# EAGLE board SparkFun_MicroMod_DA16200_Function-Panel (EAGLE 9.6.2), part 1 of 2
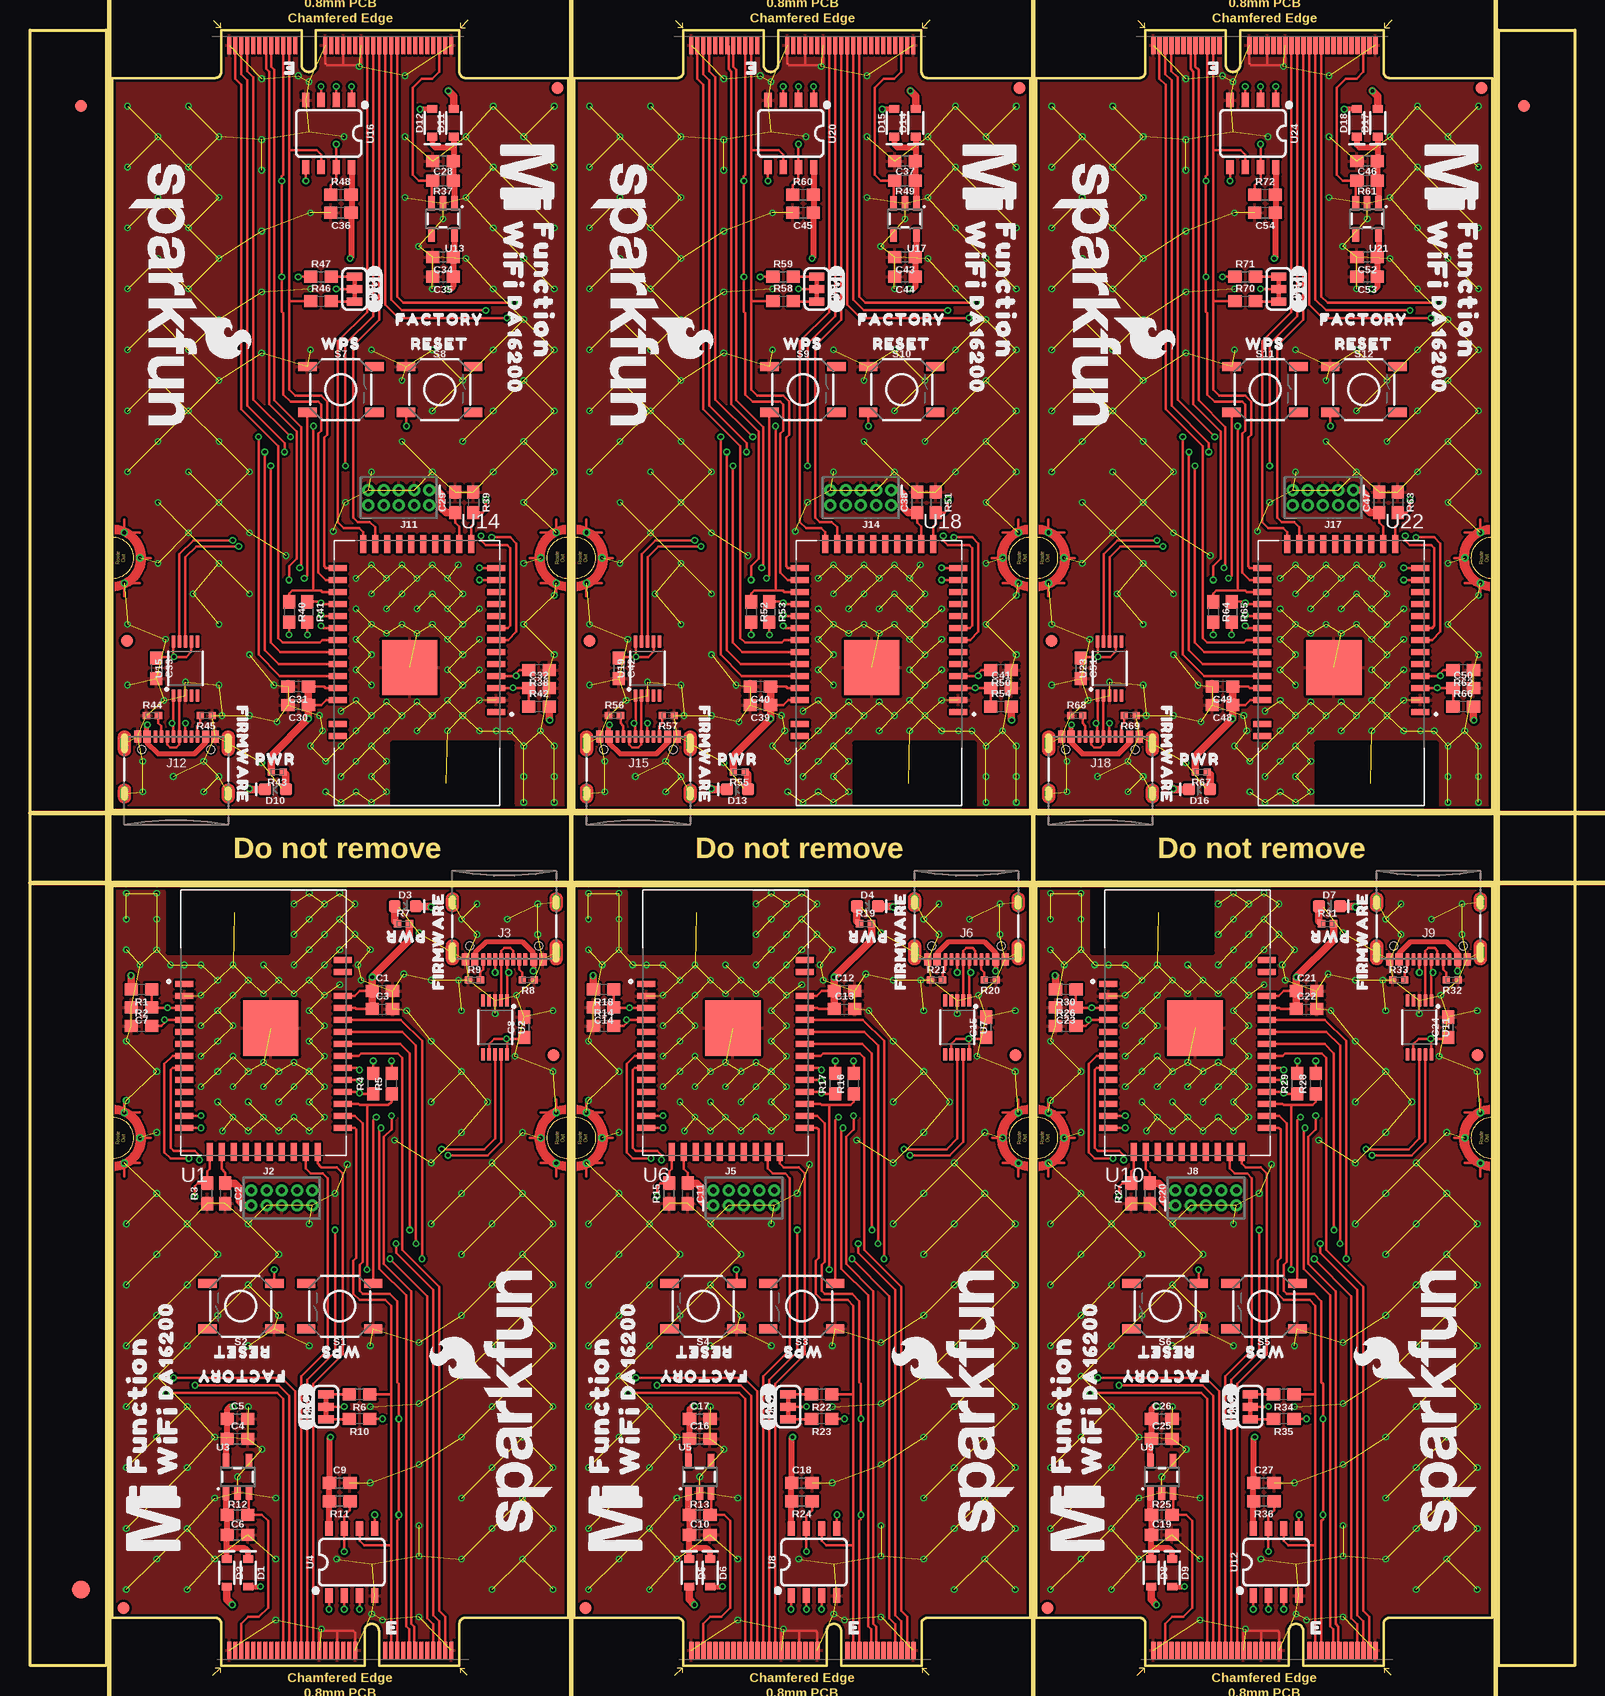
[diagram p0: board, top side]
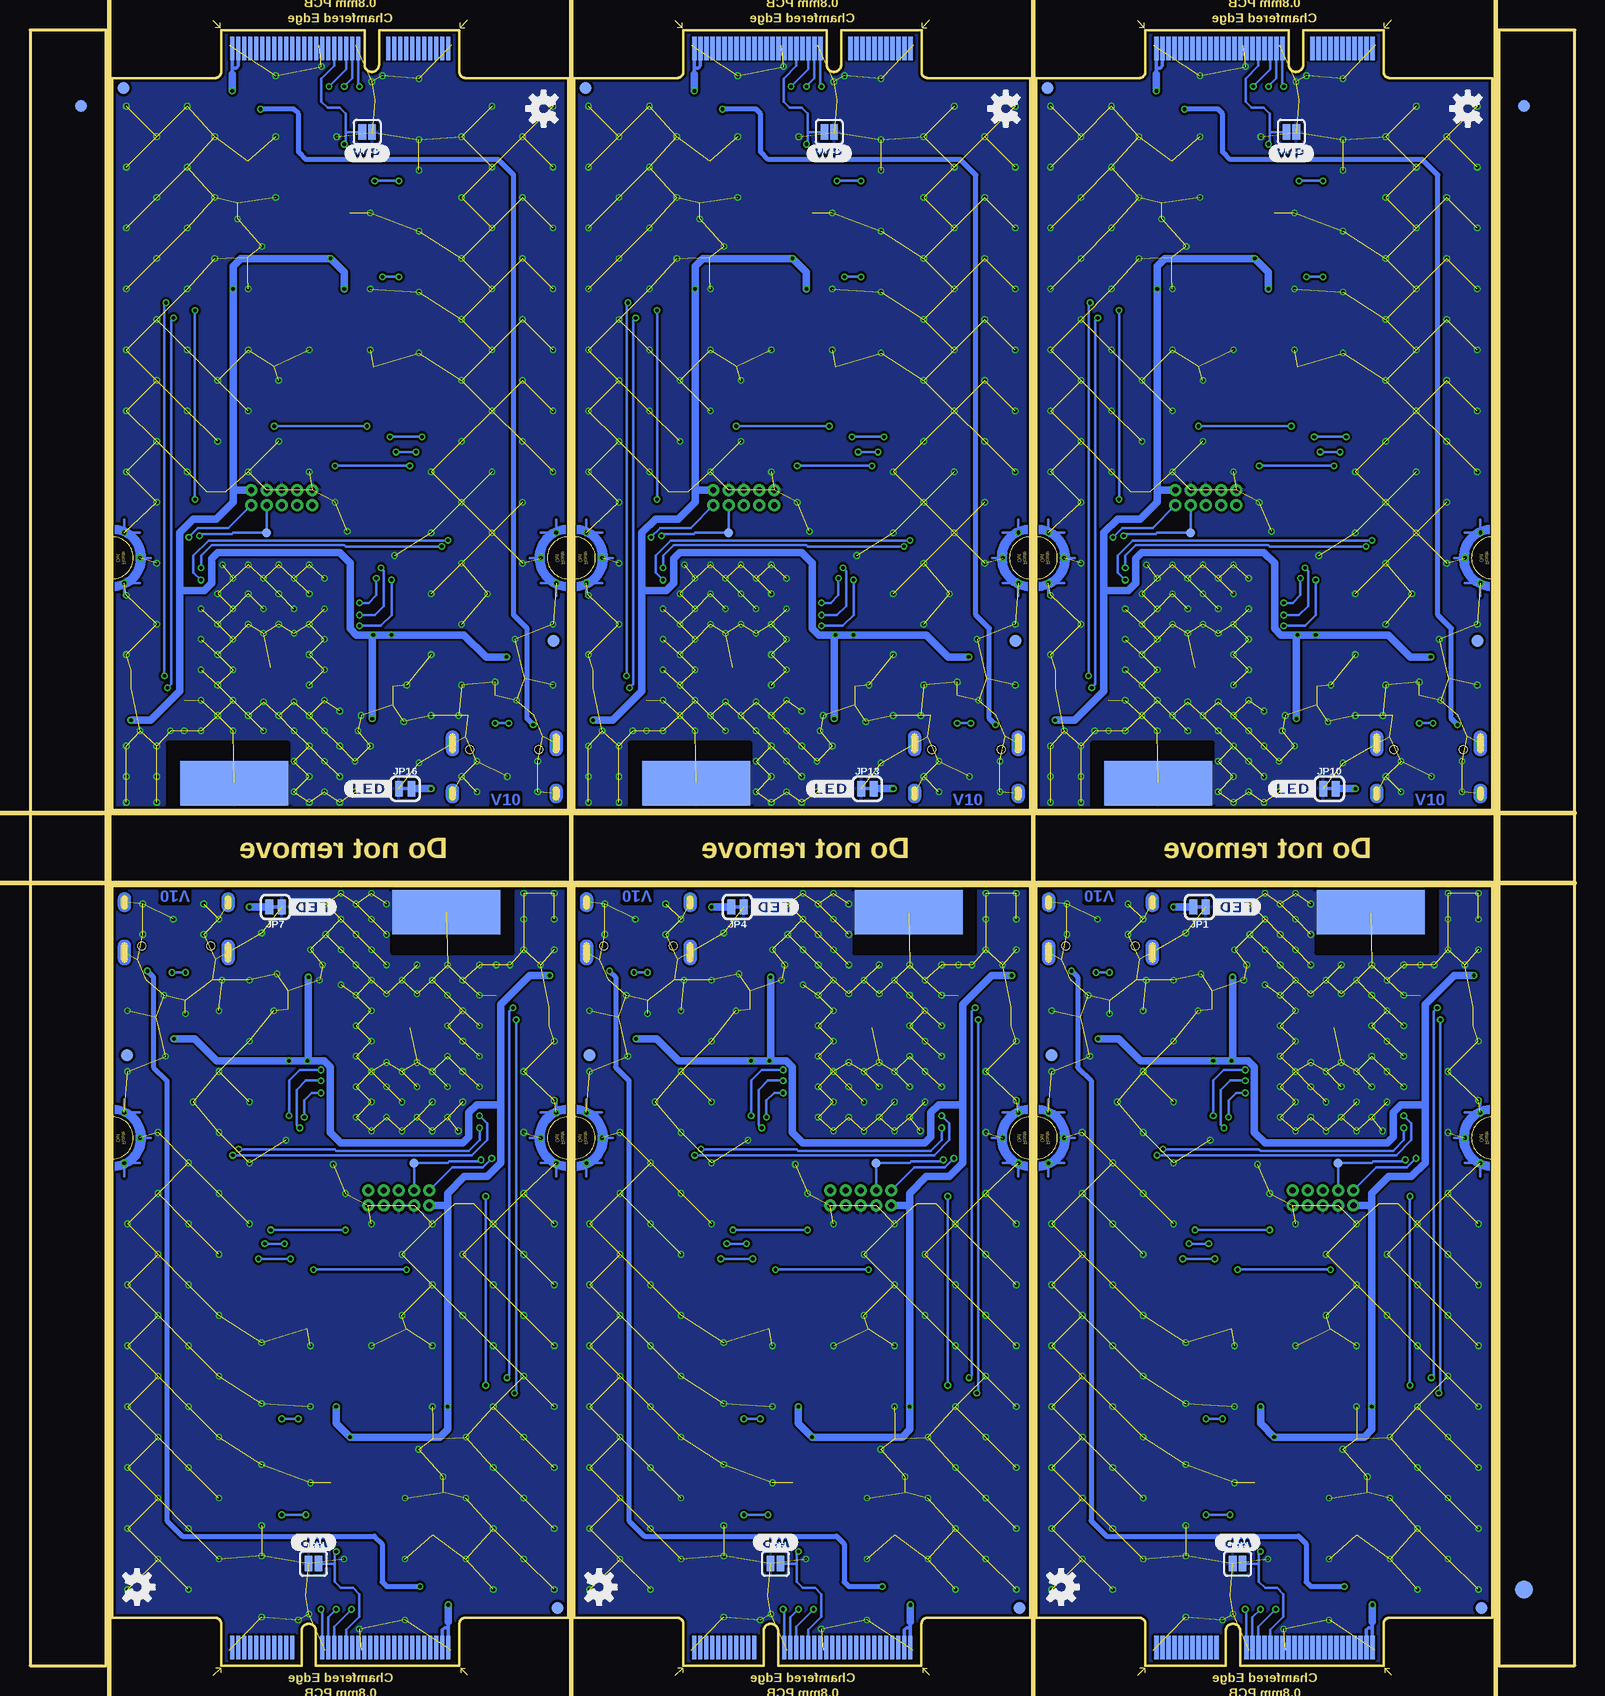
[diagram p1: board, bottom side, seen from below]

Size 128.73 x 136.35 mm. Coordinates in mm from the lower left corner, seen from the top.
Outline: 44.86,4 44.86,65 6.86,65 6.86,4 15.46,4 arc-84 15.93,3.5 15.93,0 27.88,0 27.88,2.9 arc-180 29.08,2.9 29.08,0 35.78,0 35.78,3.5 arc-85 36.26,4 44.86,4
Outline: 83.37,4 83.37,65 45.37,65 45.37,4 53.97,4 arc-84 54.44,3.5 54.44,0 66.39,0 66.39,2.9 arc-180 67.59,2.9 67.59,0 74.29,0 74.29,3.5 arc-85 74.77,4 83.37,4
Outline: 121.87,4 121.87,65 83.87,65 83.87,4 92.47,4 arc-84 92.95,3.5 92.95,0 104.9,0 104.9,2.9 arc-180 106.1,2.9 106.1,0 112.8,0 112.8,3.5 arc-85 113.27,4 121.87,4
Outline: 6.86,132.35 6.86,71.35 44.86,71.35 44.86,132.35 36.26,132.35 arc-84 35.78,132.85 35.78,136.35 23.83,136.35 23.83,133.45 arc-180 22.63,133.45 22.63,136.35 15.93,136.35 15.93,132.85 arc-85 15.46,132.35 6.86,132.35
Outline: 45.36,132.35 45.36,71.35 83.36,71.35 83.36,132.35 74.76,132.35 arc-84 74.29,132.85 74.29,136.35 62.34,136.35 62.34,133.45 arc-180 61.14,133.45 61.14,136.35 54.44,136.35 54.44,132.85 arc-85 53.96,132.35 45.36,132.35
Outline: 83.87,132.35 83.87,71.35 121.87,71.35 121.87,132.35 113.27,132.35 arc-84 112.8,132.85 112.8,136.35 100.85,136.35 100.85,133.45 arc-180 99.65,133.45 99.65,136.35 92.95,136.35 92.95,132.85 arc-85 92.47,132.35 83.87,132.35
Outline: 122.38,136.35 128.73,136.35 128.73,0 122.38,0 122.38,136.35
Outline: 0,136.35 6.35,136.35 6.35,0 0,0 0,136.35
Copper layers (1*16): Top 0.035mm / dielectric 1.5mm / Bottom 0.035mm
Design rules "SparkFun_MicroMod_DA16200_Function": minimum track width 5mil, minimum drill 0.3mm, track to track 5mil, track to pad 5mil, pad to pad 5mil, via to via 5mil, smd to smd 5mil, copper to edge 7mil, drill to drill 7mil, minimum pad ring 5mil, minimum via ring 5mil, stop-mask expansion 2.5mil, vias tented up to drill 25mil, thermal gap 10mil
Milling: 6 lines

## Footprints (pad centres in the part's own frame; a part is rotated, then mirrored left to right if it is on the bottom)
0603 = smd 1.1 x 1: 1 -0.85,0; 2 0.85,0
SOD-323 = smd 0.63 x 0.83: A 1.15,0; C -1.15,0
LED-0603 = smd 1 x 1: A -0.877,0; C 0.877,0
FIDUCIAL-1X2 = smd 1 x 1: 1 0,0
FIDUCIAL-1.5X3 = smd 1.5 x 1.5: 1 0,0
M.2-CARD-E-22_FUNCTION_STANDARD = smd 0.35 x 1.45: 1 9.25,1.275; 3 8.75,1.275; 5 8.25,1.275; 7 7.75,1.275; 9 7.25,1.275; 11 6.75,1.275; 13 6.25,1.275; 15 5.75,1.275; 17 5.25,1.275; 19 4.75,1.275; 21 4.25,1.275; 23 3.75,1.275; 33 1.25,1.275; 35 0.75,1.275; 37 0.25,1.275; 39 -0.25,1.275; 41 -0.75,1.275; 43 -1.25,1.275; 45 -1.75,1.275; 47 -2.25,1.275; 49 -2.75,1.275; 51 -3.25,1.275; 53 -3.75,1.275; 55 -4.25,1.275; 57 -4.75,1.275; 59 -5.25,1.275; 61 -5.75,1.275; 63 -6.25,1.275; 65 -6.75,1.275; 67 -7.25,1.275; 69 -7.75,1.275; 71 -8.25,1.275; 73 -8.75,1.275; 75 -9.25,1.275 | smd 0.35 x 1.95 bottom: 2 9,1.525; 4 8.5,1.525; 6 8,1.525; 8 7.5,1.525; 10 7,1.525; 12 6.5,1.525; 14 6,1.525; 16 5.5,1.525; 18 5,1.525; 20 4.5,1.525; 22 4,1.525; 32 1.5,1.525; 34 1,1.525; 36 0.5,1.525; 38 0,1.525; 40 -0.5,1.525; 42 -1,1.525; 44 -1.5,1.525; 46 -2,1.525; 48 -2.5,1.525; 50 -3,1.525; 52 -3.5,1.525; 54 -4,1.525; 56 -4.5,1.525; 58 -5,1.525; 60 -5.5,1.525; 62 -6,1.525; 64 -6.5,1.525; 66 -7,1.525; 68 -7.5,1.525; 70 -8,1.525; 72 -8.5,1.525; 74 -9,1.525 | drill 0.305 pad 0.61: GND1 -18,41.9; GND2 -16.7,44; GND3 -18,46.1; GND4 18,41.9; GND5 16.7,44; GND6 18,46.1
2X5-PTH-1.27MM-NO_SILK = drill 0.508 pad 1: 1 -2.54,-0.635; 2 -2.54,0.635; 3 -1.27,-0.635; 4 -1.27,0.635; 5 0,-0.635; 6 0,0.635; 7 1.27,-0.635; 8 1.27,0.635; 9 2.54,-0.635; 10 2.54,0.635
USB-C-16P-2LAYER-PADS = smd 0.3 x 1: A5 -1.25,-0.34; A6 -0.25,-0.34; A7 0.25,-0.34; A8 1.25,-0.34; B5 1.75,-0.34; B6 0.75,-0.34; B7 -0.75,-0.34; B8 -1.75,-0.34 | smd 0.6 x 1: GND -3.225,-0.34; GND2 3.225,-0.34; VBUS1 -2.45,-0.34; VBUS2 2.45,-0.34 | drill 0.4 pad 0.6 long: SHLD1 -4.318,-0.915; SHLD2 4.318,-0.915; SHLD3 -4.318,-5.095; SHLD4 4.318,-5.095 | hole 0.65: -2.89,-1.445; 2.89,-1.445
SMT-JUMPER_2_NC_TRACE_SILK = smd 0.66 x 1.27: 1 -0.521,0; 2 0.521,0
SMT-JUMPER_3_2-NC_TRACE_SILK = smd 0.66 x 1.27: 1 -1.041,0; 2 0,0; 3 1.041,0
SMT-JUMPER_2_NO_SILK = smd 0.635 x 1.27: 1 -0.406,0; 2 0.406,0
0402-TIGHT = smd 0.6 x 0.6: 1 -0.5,0; 2 0.5,0
TACTILE_SWITCH_SMD_5.2MM = smd 1.524 x 0.762: 1 -2.794,1.905; 2 2.794,1.905; 3 -2.794,-1.905; 4 2.794,-1.905
PAD.03X.03 = smd 0.762 x 0.762: 1 0,0
XCVR_DA16200MOD-AAC4WA32 = smd 1.5 x 0.5: 1 -6.6,3.25; 2 -6.6,2.25; 3 -6.6,1.25; 4 -6.6,0.25; 5 -6.6,-0.75; 6 -6.6,-1.75; 7 -6.6,-2.75; 8 -6.6,-3.75; 9 -6.6,-4.75; 10 -6.6,-5.75; 11 -6.6,-6.75; 12 -6.6,-7.75; 13 -6.6,-8.75; 24 6.6,-8.75; 25 6.6,-7.75; 26 6.6,-6.75; 27 6.6,-5.75; 28 6.6,-4.75; 29 6.6,-3.75; 30 6.6,-2.75; 31 6.6,-1.75; 32 6.6,-0.75; 33 6.6,0.25; 34 6.6,1.25; 35 6.6,2.25; 36 6.6,4.25; 37 6.6,5.25 | smd 0.5 x 1.5: 14 -4.5,-10.75; 15 -3.5,-10.75; 16 -2.5,-10.75; 17 -1.5,-10.75; 18 -0.5,-10.75; 19 0.5,-10.75; 20 1.5,-10.75; 21 2.5,-10.75; 22 3.5,-10.75; 23 4.5,-10.75 | smd 9 x 3.7 bottom: ANT_GND -2.45,9.2 | smd 4.6 x 4.6: GND 0.61,-0.45
MSOP10 = smd 1 x 0.3: 1 -2.25,1; 2 -2.25,0.5; 3 -2.25,0; 4 -2.25,-0.5; 5 -2.25,-1; 6 2.25,-1; 7 2.25,-0.5; 8 2.25,0; 9 2.25,0.5; 10 2.25,1
SOT23-5 = smd 0.55 x 1.2: 1 -0.95,-1.3; 2 0,-1.3; 3 0.95,-1.3; 4 0.95,1.3; 5 -0.95,1.3
SO08 = smd 0.6 x 1.2: 1 -1.905,-2.8; 2 -0.635,-2.8; 3 0.635,-2.8; 4 1.905,-2.8; 5 1.905,2.8; 6 0.635,2.8; 7 -0.635,2.8; 8 -1.905,2.8

## Placement (x,y rotation side)
C1  10uF  [0603]  29.36,56.26 0 top
C2  1uF  [0603]  16.28,39.37 270 top
C3  1uF  [0603]  29.36,54.74 0 top
C4  1.0uF  [0603]  17.3,18.92 0 top
C5  0.1uF  [0603]  17.3,20.57 0 top
C6  1.0uF  [0603]  17.3,10.92 0 top
C7  DNP  [0603]  9.3,54.86 180 top
C8  0.1uF  [0603]  41.18,53.21 90 top
C9  0.1uF  [0603]  25.81,15.24 0 top
C10  1.0uF  [0603]  55.81,10.92 0 top
C11  1uF  [0603]  54.79,39.37 270 top
C12  10uF  [0603]  67.87,56.26 0 top
C13  1uF  [0603]  67.87,54.74 0 top
C14  DNP  [0603]  47.81,54.86 180 top
C15  0.1uF  [0603]  79.68,53.21 90 top
C16  1.0uF  [0603]  55.81,18.92 0 top
C17  0.1uF  [0603]  55.81,20.57 0 top
C18  0.1uF  [0603]  64.32,15.24 0 top
C19  1.0uF  [0603]  94.32,10.92 0 top
C20  1uF  [0603]  93.3,39.37 270 top
C21  10uF  [0603]  106.38,56.26 0 top
C22  1uF  [0603]  106.38,54.74 0 top
C23  DNP  [0603]  86.31,54.86 180 top
C24  0.1uF  [0603]  118.19,53.21 90 top
C25  1.0uF  [0603]  94.32,18.92 0 top
C26  0.1uF  [0603]  94.32,20.57 0 top
C27  0.1uF  [0603]  102.82,15.24 0 top
C28  1.0uF  [0603]  34.42,125.43 180 top
C29  1uF  [0603]  35.43,96.98 90 top
C30  10uF  [0603]  22.35,80.09 180 top
C31  1uF  [0603]  22.35,81.61 180 top
C32  DNP  [0603]  42.42,81.49 0 top
C33  0.1uF  [0603]  10.54,83.14 270 top
C34  1.0uF  [0603]  34.42,117.43 180 top
C35  0.1uF  [0603]  34.42,115.78 180 top
C36  0.1uF  [0603]  25.91,121.11 180 top
C37  1.0uF  [0603]  72.92,125.43 180 top
C38  1uF  [0603]  73.94,96.98 90 top
C39  10uF  [0603]  60.86,80.09 180 top
C40  1uF  [0603]  60.86,81.61 180 top
C41  DNP  [0603]  80.92,81.49 0 top
C42  0.1uF  [0603]  49.05,83.14 270 top
C43  1.0uF  [0603]  72.92,117.43 180 top
C44  0.1uF  [0603]  72.92,115.78 180 top
C45  0.1uF  [0603]  64.41,121.11 180 top
C46  1.0uF  [0603]  111.43,125.43 180 top
C47  1uF  [0603]  112.45,96.98 90 top
C48  10uF  [0603]  99.37,80.09 180 top
C49  1uF  [0603]  99.37,81.61 180 top
C50  DNP  [0603]  119.43,81.49 0 top
C51  0.1uF  [0603]  87.56,83.14 270 top
C52  1.0uF  [0603]  111.43,117.43 180 top
C53  0.1uF  [0603]  111.43,115.78 180 top
C54  0.1uF  [0603]  102.92,121.11 180 top
D1  [SOD-323]  18.19,7.75 270 top
D2  [SOD-323]  16.41,7.75 270 top
D3  RED  [LED-0603]  31.27,63.3 0 top
D4  RED  [LED-0603]  69.78,63.3 0 top
D5  [SOD-323]  54.92,7.75 270 top
D6  [SOD-323]  56.7,7.75 270 top
D7  RED  [LED-0603]  108.29,63.3 0 top
D8  [SOD-323]  93.43,7.75 270 top
D9  [SOD-323]  95.2,7.75 270 top
D10  RED  [LED-0603]  20.45,73.05 180 top
D11  [SOD-323]  35.31,128.6 90 top
D12  [SOD-323]  33.53,128.6 90 top
D13  RED  [LED-0603]  58.95,73.05 180 top
D14  [SOD-323]  73.81,128.6 90 top
D15  [SOD-323]  72.03,128.6 90 top
D16  RED  [LED-0603]  97.46,73.05 180 top
D17  [SOD-323]  112.32,128.6 90 top
D18  [SOD-323]  110.54,128.6 90 top
E$1  [FIDUCIAL-1X2]  4.23,130 0 top
E$2  [FIDUCIAL-1X2]  4.23,130 0 bottom
E$3  [FIDUCIAL-1X2]  124.5,130 0 top
E$4  [FIDUCIAL-1X2]  124.5,130 0 bottom
E$5  [FIDUCIAL-1.5X3]  4.23,6.35 0 top
E$6  [FIDUCIAL-1.5X3]  4.23,6.35 0 bottom
FD1  FIDUCIAL1X2  [FIDUCIAL-1X2]  7.77,4.83 90 top
FD2  FIDUCIAL1X2  [FIDUCIAL-1X2]  7.77,4.83 270 bottom
FD3  FIDUCIAL1X2  [FIDUCIAL-1X2]  43.61,50.9 90 top
FD4  FIDUCIAL1X2  [FIDUCIAL-1X2]  43.61,50.9 270 bottom
FD5  FIDUCIAL1X2  [FIDUCIAL-1X2]  46.28,4.83 90 top
FD6  FIDUCIAL1X2  [FIDUCIAL-1X2]  46.28,4.83 270 bottom
FD7  FIDUCIAL1X2  [FIDUCIAL-1X2]  82.12,50.9 90 top
FD8  FIDUCIAL1X2  [FIDUCIAL-1X2]  82.12,50.9 270 bottom
FD9  FIDUCIAL1X2  [FIDUCIAL-1X2]  84.79,4.83 90 top
FD10  FIDUCIAL1X2  [FIDUCIAL-1X2]  84.79,4.83 270 bottom
FD11  FIDUCIAL1X2  [FIDUCIAL-1X2]  120.63,50.9 90 top
FD12  FIDUCIAL1X2  [FIDUCIAL-1X2]  120.63,50.9 270 bottom
FD13  FIDUCIAL1X2  [FIDUCIAL-1X2]  43.94,131.52 270 top
FD14  FIDUCIAL1X2  [FIDUCIAL-1X2]  43.94,131.52 90 bottom
FD15  FIDUCIAL1X2  [FIDUCIAL-1X2]  8.1,85.45 270 top
FD16  FIDUCIAL1X2  [FIDUCIAL-1X2]  8.1,85.45 90 bottom
FD17  FIDUCIAL1X2  [FIDUCIAL-1X2]  82.45,131.52 270 top
FD18  FIDUCIAL1X2  [FIDUCIAL-1X2]  82.45,131.52 90 bottom
FD19  FIDUCIAL1X2  [FIDUCIAL-1X2]  46.61,85.45 270 top
FD20  FIDUCIAL1X2  [FIDUCIAL-1X2]  46.61,85.45 90 bottom
FD21  FIDUCIAL1X2  [FIDUCIAL-1X2]  120.96,131.52 270 top
FD22  FIDUCIAL1X2  [FIDUCIAL-1X2]  120.96,131.52 90 bottom
FD23  FIDUCIAL1X2  [FIDUCIAL-1X2]  85.12,85.45 270 top
FD24  FIDUCIAL1X2  [FIDUCIAL-1X2]  85.12,85.45 90 bottom
J1  MICROMOD_STANDARD  [M.2-CARD-E-22_FUNCTION_STANDARD]  25.86,0 0 top
J2  CORTEX_JTAG_DEBUG  [2X5-PTH-1.27MM-NO_SILK]  20.98,38.99 0 top
J3  [USB-C-16P-2LAYER-PADS]  39.52,58.55 180 top
J4  MICROMOD_STANDARD  [M.2-CARD-E-22_FUNCTION_STANDARD]  64.37,0 0 top
J5  CORTEX_JTAG_DEBUG  [2X5-PTH-1.27MM-NO_SILK]  59.49,38.99 0 top
J6  [USB-C-16P-2LAYER-PADS]  78.03,58.55 180 top
J7  MICROMOD_STANDARD  [M.2-CARD-E-22_FUNCTION_STANDARD]  102.87,0 0 top
J8  CORTEX_JTAG_DEBUG  [2X5-PTH-1.27MM-NO_SILK]  98,38.99 0 top
J9  [USB-C-16P-2LAYER-PADS]  116.54,58.55 180 top
J10  MICROMOD_STANDARD  [M.2-CARD-E-22_FUNCTION_STANDARD]  25.86,136.35 180 top
J11  CORTEX_JTAG_DEBUG  [2X5-PTH-1.27MM-NO_SILK]  30.73,97.36 180 top
J12  [USB-C-16P-2LAYER-PADS]  12.19,77.8 0 top
J13  MICROMOD_STANDARD  [M.2-CARD-E-22_FUNCTION_STANDARD]  64.36,136.35 180 top
J14  CORTEX_JTAG_DEBUG  [2X5-PTH-1.27MM-NO_SILK]  69.24,97.36 180 top
J15  [USB-C-16P-2LAYER-PADS]  50.7,77.8 0 top
J16  MICROMOD_STANDARD  [M.2-CARD-E-22_FUNCTION_STANDARD]  102.87,136.35 180 top
J17  CORTEX_JTAG_DEBUG  [2X5-PTH-1.27MM-NO_SILK]  107.75,97.36 180 top
J18  [USB-C-16P-2LAYER-PADS]  89.21,77.8 0 top
JP1  JUMPER-SMT_2_NC_TRACE_SILK  [SMT-JUMPER_2_NC_TRACE_SILK]  31.27,63.25 180 bottom
JP2  JUMPER-SMT_3_2-NC_TRACE_SILK  [SMT-JUMPER_3_2-NC_TRACE_SILK]  24.67,21.59 90 top
JP3  [SMT-JUMPER_2_NO_SILK]  28.09,8.51 0 bottom
JP4  JUMPER-SMT_2_NC_TRACE_SILK  [SMT-JUMPER_2_NC_TRACE_SILK]  69.78,63.25 180 bottom
JP5  JUMPER-SMT_3_2-NC_TRACE_SILK  [SMT-JUMPER_3_2-NC_TRACE_SILK]  63.17,21.59 90 top
JP6  [SMT-JUMPER_2_NO_SILK]  66.6,8.51 0 bottom
JP7  JUMPER-SMT_2_NC_TRACE_SILK  [SMT-JUMPER_2_NC_TRACE_SILK]  108.29,63.25 180 bottom
JP8  JUMPER-SMT_3_2-NC_TRACE_SILK  [SMT-JUMPER_3_2-NC_TRACE_SILK]  101.68,21.59 90 top
JP9  [SMT-JUMPER_2_NO_SILK]  105.11,8.51 0 bottom
JP10  JUMPER-SMT_2_NC_TRACE_SILK  [SMT-JUMPER_2_NC_TRACE_SILK]  20.45,73.1 0 bottom
JP11  JUMPER-SMT_3_2-NC_TRACE_SILK  [SMT-JUMPER_3_2-NC_TRACE_SILK]  27.05,114.76 270 top
JP12  [SMT-JUMPER_2_NO_SILK]  23.62,127.84 180 bottom
JP13  JUMPER-SMT_2_NC_TRACE_SILK  [SMT-JUMPER_2_NC_TRACE_SILK]  58.95,73.1 0 bottom
JP14  JUMPER-SMT_3_2-NC_TRACE_SILK  [SMT-JUMPER_3_2-NC_TRACE_SILK]  65.56,114.76 270 top
JP15  [SMT-JUMPER_2_NO_SILK]  62.13,127.84 180 bottom
JP16  JUMPER-SMT_2_NC_TRACE_SILK  [SMT-JUMPER_2_NC_TRACE_SILK]  97.46,73.1 0 bottom
JP17  JUMPER-SMT_3_2-NC_TRACE_SILK  [SMT-JUMPER_3_2-NC_TRACE_SILK]  104.07,114.76 270 top
JP18  [SMT-JUMPER_2_NO_SILK]  100.64,127.84 180 bottom
LOGO1  SFE_LOGO_NAME_FLAME.2_INCH  [SFE_LOGO_NAME_FLAME_.2]  40.64,22.12 90 top
LOGO2  OSHW-LOGOS  [OSHW-LOGO-S]  42.8,6.55 270 bottom
LOGO3  SFE_LOGO_NAME_FLAME.2_INCH  [SFE_LOGO_NAME_FLAME_.2]  79.15,22.12 90 top
LOGO4  OSHW-LOGOS  [OSHW-LOGO-S]  81.31,6.55 270 bottom
LOGO5  SFE_LOGO_NAME_FLAME.2_INCH  [SFE_LOGO_NAME_FLAME_.2]  117.66,22.12 90 top
LOGO6  OSHW-LOGOS  [OSHW-LOGO-S]  119.82,6.55 270 bottom
LOGO7  SFE_LOGO_NAME_FLAME.2_INCH  [SFE_LOGO_NAME_FLAME_.2]  11.07,114.23 270 top
LOGO8  OSHW-LOGOS  [OSHW-LOGO-S]  8.92,129.8 90 bottom
LOGO9  SFE_LOGO_NAME_FLAME.2_INCH  [SFE_LOGO_NAME_FLAME_.2]  49.58,114.23 270 top
LOGO10  OSHW-LOGOS  [OSHW-LOGO-S]  47.42,129.8 90 bottom
LOGO11  SFE_LOGO_NAME_FLAME.2_INCH  [SFE_LOGO_NAME_FLAME_.2]  88.09,114.23 270 top
LOGO12  OSHW-LOGOS  [OSHW-LOGO-S]  85.93,129.8 90 bottom
R1  DNP  [0603]  9.3,56.39 180 top
R2  4.7k  [0603]  9.3,53.34 0 top
R3  4.7k  [0603]  14.76,39.37 90 top
R4  4.7k  [0603]  28.6,48.51 90 top
R5  4.7k  [0603]  30.13,48.51 90 top
R6  4.7k  [0603]  27.46,22.61 180 top
R7  1k  [0402-TIGHT]  31.12,61.85 0 top
R8  5.1k  [0402-TIGHT]  41.51,57.15 180 top
R9  5.1k  [0402-TIGHT]  37.04,57.15 0 top
R10  4.7k  [0603]  27.46,20.57 180 top
R11  10k  [0603]  25.81,13.72 180 top
R12  100k  [0603]  17.3,12.57 0 top
R13  100k  [0603]  55.81,12.57 0 top
R14  4.7k  [0603]  47.81,53.34 0 top
R15  4.7k  [0603]  53.27,39.37 90 top
R16  4.7k  [0603]  68.64,48.51 90 top
R17  4.7k  [0603]  67.11,48.51 90 top
R18  DNP  [0603]  47.81,56.39 180 top
R19  1k  [0402-TIGHT]  69.63,61.85 0 top
R20  5.1k  [0402-TIGHT]  80.02,57.15 180 top
R21  5.1k  [0402-TIGHT]  75.54,57.15 0 top
R22  4.7k  [0603]  65.97,22.61 180 top
R23  4.7k  [0603]  65.97,20.57 180 top
R24  10k  [0603]  64.32,13.72 180 top
R25  100k  [0603]  94.32,12.57 0 top
R26  4.7k  [0603]  86.31,53.34 0 top
R27  4.7k  [0603]  91.78,39.37 90 top
R28  4.7k  [0603]  107.14,48.51 90 top
R29  4.7k  [0603]  105.62,48.51 90 top
R30  DNP  [0603]  86.31,56.39 180 top
R31  1k  [0402-TIGHT]  108.13,61.85 0 top
R32  5.1k  [0402-TIGHT]  118.53,57.15 180 top
R33  5.1k  [0402-TIGHT]  114.05,57.15 0 top
R34  4.7k  [0603]  104.48,22.61 180 top
R35  4.7k  [0603]  104.48,20.57 180 top
R36  10k  [0603]  102.82,13.72 180 top
R37  100k  [0603]  34.42,123.78 180 top
R38  4.7k  [0603]  42.42,83.01 180 top
R39  4.7k  [0603]  36.96,96.98 270 top
R40  4.7k  [0603]  21.59,87.84 270 top
R41  4.7k  [0603]  23.11,87.84 270 top
R42  DNP  [0603]  42.42,79.96 0 top
R43  1k  [0402-TIGHT]  20.6,74.5 180 top
R44  5.1k  [0402-TIGHT]  10.2,79.2 0 top
R45  5.1k  [0402-TIGHT]  14.68,79.2 180 top
R46  4.7k  [0603]  24.26,113.74 0 top
R47  4.7k  [0603]  24.26,115.78 0 top
R48  10k  [0603]  25.91,122.63 0 top
R49  100k  [0603]  72.92,123.78 180 top
R50  4.7k  [0603]  80.92,83.01 180 top
R51  4.7k  [0603]  75.46,96.98 270 top
R52  4.7k  [0603]  60.1,87.84 270 top
R53  4.7k  [0603]  61.62,87.84 270 top
R54  DNP  [0603]  80.92,79.96 0 top
R55  1k  [0402-TIGHT]  59.11,74.5 180 top
R56  5.1k  [0402-TIGHT]  48.71,79.2 0 top
R57  5.1k  [0402-TIGHT]  53.19,79.2 180 top
R58  4.7k  [0603]  62.76,113.74 0 top
R59  4.7k  [0603]  62.76,115.78 0 top
R60  10k  [0603]  64.41,122.63 0 top
R61  100k  [0603]  111.43,123.78 180 top
R62  4.7k  [0603]  119.43,83.01 180 top
R63  4.7k  [0603]  113.97,96.98 270 top
R64  4.7k  [0603]  98.61,87.84 270 top
R65  4.7k  [0603]  100.13,87.84 270 top
R66  DNP  [0603]  119.43,79.96 0 top
R67  1k  [0402-TIGHT]  97.61,74.5 180 top
R68  5.1k  [0402-TIGHT]  87.22,79.2 0 top
R69  5.1k  [0402-TIGHT]  91.7,79.2 180 top
R70  4.7k  [0603]  101.27,113.74 0 top
R71  4.7k  [0603]  101.27,115.78 0 top
R72  10k  [0603]  102.92,122.63 0 top
S1  WPS  [TACTILE_SWITCH_SMD_5.2MM]  25.81,29.97 180 top
S2  FACTORY_RESET  [TACTILE_SWITCH_SMD_5.2MM]  17.58,29.97 180 top
S3  WPS  [TACTILE_SWITCH_SMD_5.2MM]  64.32,29.97 180 top
S4  FACTORY_RESET  [TACTILE_SWITCH_SMD_5.2MM]  56.09,29.97 180 top
S5  WPS  [TACTILE_SWITCH_SMD_5.2MM]  102.82,29.97 180 top
S6  FACTORY_RESET  [TACTILE_SWITCH_SMD_5.2MM]  94.59,29.97 180 top
S7  WPS  [TACTILE_SWITCH_SMD_5.2MM]  25.91,106.38 0 top
S8  FACTORY_RESET  [TACTILE_SWITCH_SMD_5.2MM]  34.14,106.38 0 top
S9  WPS  [TACTILE_SWITCH_SMD_5.2MM]  64.41,106.38 0 top
S10  FACTORY_RESET  [TACTILE_SWITCH_SMD_5.2MM]  72.64,106.38 0 top
S11  WPS  [TACTILE_SWITCH_SMD_5.2MM]  102.92,106.38 0 top
S12  FACTORY_RESET  [TACTILE_SWITCH_SMD_5.2MM]  111.15,106.38 0 top
TP1  [PAD.03X.03]  19.71,41.91 270 bottom
TP2  [PAD.03X.03]  58.22,41.91 270 bottom
TP3  [PAD.03X.03]  96.73,41.91 270 bottom
TP4  [PAD.03X.03]  32,94.44 90 bottom
TP5  [PAD.03X.03]  70.51,94.44 90 bottom
TP6  [PAD.03X.03]  109.02,94.44 90 bottom
U1  DA16200MOD  [XCVR_DA16200MOD-AAC4WA32]  19.46,53.59 0 top
U2  CH340E_MSOP10  [MSOP10]  38.76,53.21 270 top
U3  3.3V  [SOT23-5]  17.3,15.75 0 top
U4  EEPROM  [SO08]  26.82,8.64 0 top
U5  3.3V  [SOT23-5]  55.81,15.75 0 top
U6  DA16200MOD  [XCVR_DA16200MOD-AAC4WA32]  57.97,53.59 0 top
U7  CH340E_MSOP10  [MSOP10]  77.27,53.21 270 top
U8  EEPROM  [SO08]  65.33,8.64 0 top
U9  3.3V  [SOT23-5]  94.32,15.75 0 top
U10  DA16200MOD  [XCVR_DA16200MOD-AAC4WA32]  96.47,53.59 0 top
U11  CH340E_MSOP10  [MSOP10]  115.78,53.21 270 top
U12  EEPROM  [SO08]  103.84,8.64 0 top
U13  3.3V  [SOT23-5]  34.42,120.6 180 top
U14  DA16200MOD  [XCVR_DA16200MOD-AAC4WA32]  32.26,82.76 180 top
U15  CH340E_MSOP10  [MSOP10]  12.95,83.14 90 top
U16  EEPROM  [SO08]  24.89,127.71 180 top
U17  3.3V  [SOT23-5]  72.92,120.6 180 top
U18  DA16200MOD  [XCVR_DA16200MOD-AAC4WA32]  70.76,82.76 180 top
U19  CH340E_MSOP10  [MSOP10]  51.46,83.14 90 top
U20  EEPROM  [SO08]  63.4,127.71 180 top
U21  3.3V  [SOT23-5]  111.43,120.6 180 top
U22  DA16200MOD  [XCVR_DA16200MOD-AAC4WA32]  109.27,82.76 180 top
U23  CH340E_MSOP10  [MSOP10]  89.97,83.14 90 top
U24  EEPROM  [SO08]  101.91,127.71 180 top
U$1  [FIRMWARE0]  34.01,60.38 90 top
U$2  [PWR0]  31.27,60.78 180 top
U$3  [#LED#0]  30.38,63.25 180 bottom
U$4  [FUNCTION0]  8.92,21.72 90 top
U$5  [DA162000]  11.33,26.24 90 top
U$6  [WIFI0]  11.46,18.8 90 top
U$7  [WPS0]  25.81,26.16 180 top
U$8  [FACTORY0]  17.58,24.13 180 top
U$9  [RESET0]  17.58,26.16 180 top
U$10  [#WP#0]  28.09,10.29 180 bottom
U$11  [#I2C#0]  23.01,21.59 90 top
U$12  [MICROMOD_MI_LOGO_1]  10.24,12.32 90 top
U$13  [FIRMWARE0]  72.52,60.38 90 top
U$14  [PWR0]  69.78,60.78 180 top
U$15  [#LED#0]  68.89,63.25 180 bottom
U$16  [FUNCTION0]  47.43,21.72 90 top
U$17  [DA162000]  49.84,26.24 90 top
U$18  [WPS0]  64.32,26.16 180 top
U$19  [FACTORY0]  56.09,24.13 180 top
U$20  [RESET0]  56.09,26.16 180 top
U$21  [#I2C#0]  61.52,21.59 90 top
U$22  [MICROMOD_MI_LOGO_1]  48.75,12.32 90 top
U$23  [WIFI0]  49.97,18.8 90 top
U$24  [#WP#0]  66.6,10.29 180 bottom
U$25  [FIRMWARE0]  111.03,60.38 90 top
U$26  [PWR0]  108.29,60.78 180 top
U$27  [#LED#0]  107.4,63.25 180 bottom
U$28  [FUNCTION0]  85.93,21.72 90 top
U$29  [DA162000]  88.35,26.24 90 top
U$30  [WPS0]  102.82,26.16 180 top
U$31  [FACTORY0]  94.59,24.13 180 top
U$32  [RESET0]  94.59,26.16 180 top
U$33  [#I2C#0]  100.03,21.59 90 top
U$34  [MICROMOD_MI_LOGO_1]  87.25,12.32 90 top
U$35  [WIFI0]  88.47,18.8 90 top
U$36  [#WP#0]  105.11,10.29 180 bottom
U$37  [FIRMWARE0]  17.7,75.97 270 top
U$38  [PWR0]  20.45,75.57 0 top
U$39  [#LED#0]  21.34,73.1 0 bottom
U$40  [FUNCTION0]  42.8,114.63 270 top
U$41  [DA162000]  40.39,110.11 270 top
U$42  [WPS0]  25.91,110.19 0 top
U$43  [FACTORY0]  34.14,112.22 0 top
U$44  [RESET0]  34.14,110.19 0 top
U$45  [#I2C#0]  28.7,114.76 270 top
U$46  [MICROMOD_MI_LOGO_1]  41.48,124.03 270 top
U$47  [WIFI0]  40.26,117.55 270 top
U$48  [#WP#0]  23.62,126.06 0 bottom
U$49  [FIRMWARE0]  56.21,75.97 270 top
U$50  [PWR0]  58.95,75.57 0 top
U$51  [#LED#0]  59.84,73.1 0 bottom
U$52  [FUNCTION0]  81.31,114.63 270 top
U$53  [DA162000]  78.89,110.11 270 top
U$54  [WPS0]  64.41,110.19 0 top
U$55  [FACTORY0]  72.64,112.22 0 top
U$56  [RESET0]  72.64,110.19 0 top
U$57  [#I2C#0]  67.21,114.76 270 top
U$58  [MICROMOD_MI_LOGO_1]  79.98,124.03 270 top
U$59  [WIFI0]  78.77,117.55 270 top
U$60  [#WP#0]  62.13,126.06 0 bottom
U$61  [FIRMWARE0]  94.72,75.97 270 top
U$62  [PWR0]  97.46,75.57 0 top
U$63  [#LED#0]  98.35,73.1 0 bottom
U$64  [FUNCTION0]  119.81,114.63 270 top
U$65  [DA162000]  117.4,110.11 270 top
U$66  [WPS0]  102.92,110.19 0 top
U$67  [FACTORY0]  111.15,112.22 0 top
U$68  [RESET0]  111.15,110.19 0 top
U$69  [#I2C#0]  105.72,114.76 270 top
U$70  [MICROMOD_MI_LOGO_1]  118.49,124.03 270 top
U$71  [WIFI0]  117.27,117.55 270 top
U$72  [#WP#0]  100.64,126.06 0 bottom

## Library data of the parts
C1 C12 C21 C30 C39 C48 = SparkFun-Capacitors; PROD_ID: CAP-11015
C2-C4 C6 C10 C11 C13 C16 C19 C20 C22 C25 C28 C29 C31 C34 C37 C38 C40 C43 C46 C47 C49 C52 = SparkFun-Capacitors; PROD_ID: CAP-00868
C5 C8 C9 C15 C17 C18 C24 C26 C27 C33 C35 C36 C42 C44 C45 C51 C53 C54 = SparkFun-Capacitors; PROD_ID: CAP-00810
C7 C14 C23 C32 C41 C50 = SparkFun-Capacitors
D1 D2 D5 D6 D8 D9 D11 D12 D14 D15 D17 D18 = SparkFun-DiscreteSemi; PROD_ID: DIO-14072
D3 D4 D7 D10 D13 D16 J1 J4 J7 J10 J13 J16 = SparkFun-MicroMod-Function
E$1-E$4 FD1-FD24 LOGO1-LOGO12 = SparkFun-Aesthetics
E$5 E$6 = SparkFun-Retired
J2 J5 J8 J11 J14 J17 TP1-TP6 = SparkFun-Connectors
J3 J6 J9 J12 J15 J18 = SparkFun-Connectors; PROD_ID: CONN-14122
JP1-JP18 = SparkFun-Jumpers
R1 R18 R30 R42 R54 R66 = SparkFun-Resistors
R2-R6 R10 R14-R17 R22 R23 R26-R29 R34 R35 R38-R41 R46 R47 R50-R53 R58 R59 R62-R65 R70 R71 = SparkFun-Resistors; PROD_ID: RES-07857
R7 R19 R31 R43 R55 R67 = SparkFun-Resistors; PROD_ID: RES-14342
R8 R9 R20 R21 R32 R33 R44 R45 R56 R57 R68 R69 = SparkFun-Resistors; PROD_ID: RES-14340
R11 R24 R36 R48 R60 R72 = SparkFun-Resistors; PROD_ID: RES-00824
R12 R13 R25 R37 R49 R61 = SparkFun-Resistors; PROD_ID: RES-07828
S1-S12 = SparkFun-Switches; PROD_ID: SWCH-14139
U1 U6 U10 U14 U18 U22 = DA16200MOD; PROD_ID: IC-16179
U2 U7 U11 U15 U19 U23 = SparkFun-IC-Comms; PROD_ID: IC-14135
U3 U5 U9 U13 U17 U21 = SparkFun-IC-Power; PROD_ID: VREG-12457
U4 U8 U12 U16 U20 U24 = SparkFun-IC-Memory; PROD_ID: IC-14645
U$1-U$11 U$13-U$21 U$23-U$33 U$35-U$45 U$47-U$57 U$59-U$69 U$71 U$72 = output
U$12 U$22 U$34 U$46 U$58 U$70 = SparkFun-MicroMod

## Nets
3.3V: C1.1 C2.1 C3.1 C4.1 C5.1 C8.1 C9.1 J2.1 JP2.2 R1.2 R4.2 R5.2 R7.2 R11.2 U1.15 U1.34 U1.35 U2.7 U2.10 U3.5 U4.8
3.3V1: C11.1 C12.1 C13.1 C15.1 C16.1 C17.1 C18.1 J5.1 JP5.2 R16.2 R17.2 R18.2 R19.2 R24.2 U5.5 U6.15 U6.34 U6.35 U7.7 U7.10 U8.8
3.3V2: C20.1 C21.1 C22.1 C24.1 C25.1 C26.1 C27.1 J8.1 JP8.2 R28.2 R29.2 R30.2 R31.2 R36.2 U9.5 U10.15 U10.34 U10.35 U11.7 U11.10 U12.8
3.3V3: C29.1 C30.1 C31.1 C33.1 C34.1 C35.1 C36.1 J11.1 JP11.2 R40.2 R41.2 R42.2 R43.2 R48.2 U13.5 U14.15 U14.34 U14.35 U15.7 U15.10 U16.8
3.3V4: C38.1 C39.1 C40.1 C42.1 C43.1 C44.1 C45.1 J14.1 JP14.2 R52.2 R53.2 R54.2 R55.2 R60.2 U17.5 U18.15 U18.34 U18.35 U19.7 U19.10 U20.8
3.3V5: C47.1 C48.1 C49.1 C51.1 C52.1 C53.1 C54.1 J17.1 JP17.2 R64.2 R65.2 R66.2 R67.2 R72.2 U21.5 U22.15 U22.34 U22.35 U23.7 U23.10 U24.8
!CS!: J1.49 U1.31
!CS!1: J4.49 U6.31
!CS!2: J7.49 U10.31
!CS!3: J10.49 U14.31
!CS!4: J13.49 U18.31
!CS!5: J16.49 U22.31
CIPO: J1.7 U1.33
CIPO1: J4.7 U6.33
CIPO2: J7.7 U10.33
CIPO3: J10.7 U14.33
CIPO4: J13.7 U18.33
CIPO5: J16.7 U22.33
COPI: J1.5 U1.32
COPI1: J4.5 U6.32
COPI2: J7.5 U10.32
COPI3: J10.5 U14.32
COPI4: J13.5 U18.32
COPI5: J16.5 U22.32
EN: J1.71 R12.2 U3.3
EN1: J4.71 R13.2 U5.3
EN2: J7.71 R25.2 U9.3
EN3: J10.71 R37.2 U13.3
EN4: J13.71 R49.2 U17.3
EN5: J16.71 R61.2 U21.3
EWP: J1.40 JP3.2 R11.1 U4.7
EWP1: J4.40 JP6.2 R24.1 U8.7
EWP2: J7.40 JP9.2 R36.1 U12.7
EWP3: J10.40 JP12.2 R48.1 U16.7
EWP4: J13.40 JP15.2 R60.1 U20.7
EWP5: J16.40 JP18.2 R72.1 U24.7
FACTORY_RESET: R5.1 S2.3 U1.26
FACTORY_RESET1: R16.1 S4.3 U6.26
FACTORY_RESET2: R28.1 S6.3 U10.26
FACTORY_RESET3: R40.1 S8.3 U14.26
FACTORY_RESET4: R52.1 S10.3 U18.26
FACTORY_RESET5: R64.1 S12.3 U22.26
GND: C1.2 C2.2 C3.2 C4.2 C5.2 C6.2 C7.2 C8.2 C9.2 J1.1 J1.33 J1.39 J1.45 J1.75 J1.GND1 J1.GND2 J1.GND3 J1.GND4 J1.GND5 J1.GND6 J2.3 J2.5 J2.9 J3.GND J3.GND2 J3.SHLD1 J3.SHLD2 J3.SHLD3 J3.SHLD4 JP1.1 JP3.1 R2.1 R3.1 R8.1 R9.1 S1.1 S2.1 U1.2 U1.ANT_GND U1.GND U2.3 U3.2 U4.4
GND1: C10.2 C11.2 C12.2 C13.2 C14.2 C15.2 C16.2 C17.2 C18.2 J4.1 J4.33 J4.39 J4.45 J4.75 J4.GND1 J4.GND2 J4.GND3 J4.GND4 J4.GND5 J4.GND6 J5.3 J5.5 J5.9 J6.GND J6.GND2 J6.SHLD1 J6.SHLD2 J6.SHLD3 J6.SHLD4 JP4.1 JP6.1 R14.1 R15.1 R20.1 R21.1 S3.1 S4.1 U5.2 U6.2 U6.ANT_GND U6.GND U7.3 U8.4
GND2: C19.2 C20.2 C21.2 C22.2 C23.2 C24.2 C25.2 C26.2 C27.2 J7.1 J7.33 J7.39 J7.45 J7.75 J7.GND1 J7.GND2 J7.GND3 J7.GND4 J7.GND5 J7.GND6 J8.3 J8.5 J8.9 J9.GND J9.GND2 J9.SHLD1 J9.SHLD2 J9.SHLD3 J9.SHLD4 JP7.1 JP9.1 R26.1 R27.1 R32.1 R33.1 S5.1 S6.1 U9.2 U10.2 U10.ANT_GND U10.GND U11.3 U12.4
GND3: C28.2 C29.2 C30.2 C31.2 C32.2 C33.2 C34.2 C35.2 C36.2 J10.1 J10.33 J10.39 J10.45 J10.75 J10.GND1 J10.GND2 J10.GND3 J10.GND4 J10.GND5 J10.GND6 J11.3 J11.5 J11.9 J12.GND J12.GND2 J12.SHLD1 J12.SHLD2 J12.SHLD3 J12.SHLD4 JP10.1 JP12.1 R38.1 R39.1 R44.1 R45.1 S7.1 S8.1 U13.2 U14.2 U14.ANT_GND U14.GND U15.3 U16.4
GND4: C37.2 C38.2 C39.2 C40.2 C41.2 C42.2 C43.2 C44.2 C45.2 J13.1 J13.33 J13.39 J13.45 J13.75 J13.GND1 J13.GND2 J13.GND3 J13.GND4 J13.GND5 J13.GND6 J14.3 J14.5 J14.9 J15.GND J15.GND2 J15.SHLD1 J15.SHLD2 J15.SHLD3 J15.SHLD4 JP13.1 JP15.1 R50.1 R51.1 R56.1 R57.1 S9.1 S10.1 U17.2 U18.2 U18.ANT_GND U18.GND U19.3 U20.4
GND5: C46.2 C47.2 C48.2 C49.2 C50.2 C51.2 C52.2 C53.2 C54.2 J16.1 J16.33 J16.39 J16.45 J16.75 J16.GND1 J16.GND2 J16.GND3 J16.GND4 J16.GND5 J16.GND6 J17.3 J17.5 J17.9 J18.GND J18.GND2 J18.SHLD1 J18.SHLD2 J18.SHLD3 J18.SHLD4 JP16.1 JP18.1 R62.1 R63.1 R68.1 R69.1 S11.1 S12.1 U21.2 U22.2 U22.ANT_GND U22.GND U23.3 U24.4
GPIOA1: J4.47 U6.23
GPIOA2: J4.51 U6.22
GPIOA3: J7.47 U10.23
GPIOA4: J7.51 U10.22
GPIOA5: J10.47 U14.23
GPIOA6: J10.51 U14.22
GPIOA7: J13.47 U18.23
GPIOA8: J13.51 U18.22
GPIOA9: J16.47 U22.23
GPIOA10: J1.47 U1.23
GPIOA11: J1.51 U1.22
GPIOA12: J16.51 U22.22
I2C_SCL: J1.21 R6.1 U1.24 U4.6
I2C_SCL1: J4.21 R22.1 U6.24 U8.6
I2C_SCL2: J7.21 R34.1 U10.24 U12.6
I2C_SCL3: J10.21 R46.1 U14.24 U16.6
I2C_SCL4: J13.21 R58.1 U18.24 U20.6
I2C_SCL5: J16.21 R70.1 U22.24 U24.6
I2C_SDA: J1.19 R10.1 U1.25 U4.5
I2C_SDA1: J4.19 R23.1 U6.25 U8.5
I2C_SDA2: J7.19 R35.1 U10.25 U12.5
I2C_SDA3: J10.19 R47.1 U14.25 U16.5
I2C_SDA4: J13.19 R59.1 U18.25 U20.5
I2C_SDA5: J16.19 R71.1 U22.25 U24.5
N$1: J1.36 U4.1
N$2: J3.A5 R8.2
N$3: C6.1 D1.C D2.C R12.1 U3.1
N$4: D4.C JP4.2
N$5: J3.B5 R9.2
N$6: D3.C JP1.2
N$7: D3.A R7.1
N$8: J1.32 U4.3
N$9: J1.34 U4.2
N$10: J3.A6 J3.B6 U2.1
N$11: J3.A7 J3.B7 U2.2
N$12: D4.A R19.1
N$13: JP2.1 R10.2
N$14: JP2.3 R6.2
N$15: J6.A5 R20.2
N$16: J6.B5 R21.2
N$17: J6.A6 J6.B6 U7.1
N$18: J6.A7 J6.B7 U7.2
N$19: J4.32 U8.3
N$20: J4.34 U8.2
N$21: J4.36 U8.1
N$22: JP5.1 R23.2
N$23: JP5.3 R22.2
N$24: C10.1 D5.C D6.C R13.1 U5.1
N$25: D7.C JP7.2
N$26: D7.A R31.1
N$27: J9.A5 R32.2
N$28: J9.B5 R33.2
N$29: J9.A6 J9.B6 U11.1
N$30: J9.A7 J9.B7 U11.2
N$31: J7.32 U12.3
N$32: J7.34 U12.2
N$33: J7.36 U12.1
N$34: JP8.1 R35.2
N$35: JP8.3 R34.2
N$36: C19.1 D8.C D9.C R25.1 U9.1
N$37: D10.C JP10.2
N$38: D10.A R43.1
N$39: J12.A5 R44.2
N$40: J12.B5 R45.2
N$41: J12.A6 J12.B6 U15.1
N$42: J12.A7 J12.B7 U15.2
N$43: J10.32 U16.3
N$44: J10.34 U16.2
N$45: J10.36 U16.1
N$46: JP11.1 R47.2
N$47: JP11.3 R46.2
N$48: C28.1 D11.C D12.C R37.1 U13.1
N$49: D13.C JP13.2
N$50: D13.A R55.1
N$51: J15.A5 R56.2
N$52: J15.B5 R57.2
N$53: J15.A6 J15.B6 U19.1
N$54: J15.A7 J15.B7 U19.2
N$55: J13.32 U20.3
N$56: J13.34 U20.2
N$57: J13.36 U20.1
N$58: JP14.1 R59.2
N$59: JP14.3 R58.2
N$60: C37.1 D14.C D15.C R49.1 U17.1
N$61: D16.C JP16.2
N$62: D16.A R67.1
N$63: J18.A5 R68.2
N$64: J18.B5 R69.2
N$65: J18.A6 J18.B6 U23.1
N$66: J18.A7 J18.B7 U23.2
N$67: J16.32 U24.3
N$68: J16.34 U24.2
N$69: J16.36 U24.1
N$70: JP17.1 R71.2
N$71: JP17.3 R70.2
N$72: C46.1 D17.C D18.C R61.1 U21.1
RTC_PWR_KEY: C7.1 J1.53 R1.1 U1.3
RTC_PWR_KEY1: C14.1 J4.53 R18.1 U6.3
RTC_PWR_KEY2: C23.1 J7.53 R30.1 U10.3
RTC_PWR_KEY3: C32.1 J10.53 R42.1 U14.3
RTC_PWR_KEY4: C41.1 J13.53 R54.1 U18.3
RTC_PWR_KEY5: C50.1 J16.53 R66.1 U22.3
RTC_WAKE1: J1.57 R2.2 U1.4
RTC_WAKE2: J1.55 R3.2 U1.14
RTC_WAKE3: J4.57 R14.2 U6.4
RTC_WAKE4: J4.55 R15.2 U6.14
RTC_WAKE5: J7.57 R26.2 U10.4
RTC_WAKE6: J7.55 R27.2 U10.14
RTC_WAKE7: J10.57 R38.2 U14.4
RTC_WAKE8: J10.55 R39.2 U14.14
RTC_WAKE9: J13.57 R50.2 U18.4
RTC_WAKE10: J13.55 R51.2 U18.14
RTC_WAKE11: J16.57 R62.2 U22.4
RTC_WAKE12: J16.55 R63.2 U22.14
SCK: J1.3 U1.30
SCK1: J4.3 U6.30
SCK2: J7.3 U10.30
SCK3: J10.3 U14.30
SCK4: J13.3 U18.30
SCK5: J16.3 U22.30
TCLK: J2.4 TP1.1 U1.8
TCLK1: J5.4 TP2.1 U6.8
TCLK2: J8.4 TP3.1 U10.8
TCLK3: J11.4 TP4.1 U14.8
TCLK4: J14.4 TP5.1 U18.8
TCLK5: J17.4 TP6.1 U22.8
TMS: J2.2 U1.7
TMS1: J5.2 U6.7
TMS2: J8.2 U10.7
TMS3: J11.2 U14.7
TMS4: J14.2 U18.7
TMS5: J17.2 U22.7
U0RXI: U1.13 U2.8
U0RXI1: U6.13 U7.8
U0RXI2: U10.13 U11.8
U0RXI3: U14.13 U15.8
U0RXI4: U18.13 U19.8
U0RXI5: U22.13 U23.8
U0TXO: U1.12 U2.9
U0TXO1: U6.12 U7.9
U0TXO2: U10.12 U11.9
U0TXO3: U14.12 U15.9
U0TXO4: U18.12 U19.9
U0TXO5: U22.12 U23.9
U1RXI: J1.15 U1.28
U1RXI1: J4.15 U6.28
U1RXI2: J7.15 U10.28
U1RXI3: J10.15 U14.28
U1RXI4: J13.15 U18.28
U1RXI5: J16.15 U22.28
U1TXO: J1.13 U1.29
U1TXO1: J4.13 U6.29
U1TXO2: J7.13 U10.29
U1TXO3: J10.13 U14.29
U1TXO4: J13.13 U18.29
U1TXO5: J16.13 U22.29
V_USB: D1.A J3.VBUS1 J3.VBUS2
V_USB1: D6.A J6.VBUS1 J6.VBUS2
V_USB2: D9.A J9.VBUS1 J9.VBUS2
V_USB3: D12.A J12.VBUS1 J12.VBUS2
V_USB4: D15.A J15.VBUS1 J15.VBUS2
V_USB5: D18.A J18.VBUS1 J18.VBUS2
VCC: D2.A J1.72 J1.74
VCC1: D5.A J4.72 J4.74
VCC2: D8.A J7.72 J7.74
VCC3: D11.A J10.72 J10.74
VCC4: D14.A J13.72 J13.74
VCC5: D17.A J16.72 J16.74
WPS: R4.1 S1.3 U1.27
WPS1: R17.1 S3.3 U6.27
WPS2: R29.1 S5.3 U10.27
WPS3: R41.1 S7.3 U14.27
WPS4: R53.1 S9.3 U18.27
WPS5: R65.1 S11.3 U22.27

## Tracks (layer width: path | path; a pad name or v marks a point on that pad's centre or on a via)
3.3V  (via drill 0.3)
  Top 0.203: R5.2 v30.13,50.42 | R4.2 v28.6,50.42 | C3.1 27.21,54.74 27.1,54.84 U1.34 | C1.1 27.46,56.26 27.04,55.84 U1.35 | C2.1 16.28,41.08 15.96,41.4 U1.15 | C8.1 41.07,52.26 v39.72,52.26 | U2.10 39.76,52.21 v39.72,52.26 | U2.7 38.26,51.82 38.7,52.26 v39.72,52.26 | JP2.2 v26.19,21.59
  Top 0.508: U3.5 16.35,18.82 C4.1 C5.1 16.45,21.38 16.66,21.59 v16.92,21.59 | U4.8 24.92,13.68 R11.2 24.92,13.76 24.92,15.24 C9.1 24.96,18.96 v25.05,19.05
  Top 0.61: R7.2 31.62,60.51 v28.52,57.4 C1.1 C3.1 | R1.2 8.45,57.49 v8.41,57.53 | J2.1 17.81,38.35 17.43,38.73 17.43,39.84 17.05,40.22 C2.1
  Bottom 0.61: v39.72,52.26 38,52.26 36.16,50.42 v30.13,50.42 v28.6,50.42 | v28.6,50.42 28.52,50.42 v28.52,57.4 | v8.41,57.53 10.06,57.53 12.47,55.12 12.47,46.74 | 12.47,46.74 12.47,41.91 13.62,40.77 15.52,40.77 16.92,39.37 16.92,38.35 | J2.1 16.92,38.35 | 16.92,38.35 v16.92,21.59 16.92,19.68 17.55,19.05 v25.05,19.05 26.19,20.19 v26.19,21.59 | 12.47,46.74 14.51,46.74 15.14,46.1 15.14,44.07 15.65,43.56 25.81,43.56 26.7,44.45 26.7,49.91 27.21,50.42 v28.6,50.42
3.3V1  (via drill 0.3)
  Top 0.203: R16.2 v68.64,50.42 | R17.2 v67.11,50.42 | C13.1 65.72,54.74 65.61,54.84 U6.34 | C12.1 65.97,56.26 65.55,55.84 U6.35 | C11.1 54.79,41.08 54.47,41.4 U6.15 | C15.1 79.58,52.26 v78.23,52.26 | U7.10 78.27,52.21 v78.23,52.26 | U7.7 76.77,51.82 77.2,52.26 v78.23,52.26 | JP5.2 v64.7,21.59
  Top 0.508: U5.5 54.86,18.82 C16.1 C17.1 54.96,21.38 55.17,21.59 v55.43,21.59 | U8.8 63.43,13.68 R24.2 63.43,13.76 63.43,15.24 C18.1 63.47,18.96 v63.56,19.05
  Top 0.61: R19.2 70.13,60.51 v67.02,57.4 C12.1 C13.1 | R18.2 46.96,57.49 v46.92,57.53 | J5.1 56.32,38.35 55.94,38.73 55.94,39.84 55.55,40.22 C11.1
  Bottom 0.61: v78.23,52.26 76.51,52.26 74.67,50.42 v68.64,50.42 v67.11,50.42 | v67.11,50.42 67.02,50.42 v67.02,57.4 | v46.92,57.53 48.57,57.53 50.98,55.12 50.98,46.74 | 50.98,46.74 50.98,41.91 52.13,40.77 54.03,40.77 55.43,39.37 55.43,38.35 | J5.1 55.43,38.35 | 55.43,38.35 v55.43,21.59 55.43,19.68 56.06,19.05 v63.56,19.05 64.7,20.19 v64.7,21.59 | 50.98,46.74 53.01,46.74 53.65,46.1 53.65,44.07 54.16,43.56 64.32,43.56 65.21,44.45 65.21,49.91 65.72,50.42 v67.11,50.42
3.3V2  (via drill 0.3)
  Top 0.203: R28.2 v107.14,50.42 | R29.2 v105.62,50.42 | C22.1 104.22,54.74 104.11,54.84 U10.34 | C21.1 104.48,56.26 104.06,55.84 U10.35 | C20.1 93.3,41.08 92.97,41.4 U10.15 | C24.1 118.08,52.26 v116.73,52.26 | U11.10 116.78,52.21 v116.73,52.26 | U11.7 115.28,51.82 115.71,52.26 v116.73,52.26 | JP8.2 v103.2,21.59
  Top 0.508: U9.5 93.37,18.82 C25.1 C26.1 93.47,21.38 93.68,21.59 v93.93,21.59 | U12.8 101.94,13.68 R36.2 101.94,13.76 101.94,15.24 C27.1 101.97,18.96 v102.06,19.05
  Top 0.61: R31.2 108.63,60.51 v105.53,57.4 C21.1 C22.1 | R30.2 85.46,57.49 v85.42,57.53 | J8.1 94.82,38.35 94.44,38.73 94.44,39.84 94.06,40.22 C20.1
  Bottom 0.61: v116.73,52.26 115.02,52.26 113.18,50.42 v107.14,50.42 v105.62,50.42 | v105.62,50.42 105.53,50.42 v105.53,57.4 | v85.42,57.53 87.08,57.53 89.49,55.12 89.49,46.74 | 89.49,46.74 89.49,41.91 90.63,40.77 92.54,40.77 93.93,39.37 93.93,38.35 | J8.1 93.93,38.35 | 93.93,38.35 v93.93,21.59 93.93,19.68 94.57,19.05 v102.06,19.05 103.2,20.19 v103.2,21.59 | 89.49,46.74 91.52,46.74 92.16,46.1 92.16,44.07 92.66,43.56 102.82,43.56 103.71,44.45 103.71,49.91 104.22,50.42 v105.62,50.42
3.3V3  (via drill 0.3)
  Top 0.203: R40.2 v21.59,85.93 | R41.2 v23.11,85.93 | C31.1 24.51,81.61 24.62,81.51 U14.34 | C30.1 24.26,80.09 24.67,80.51 U14.35 | C29.1 35.43,95.27 35.76,94.95 U14.15 | C33.1 10.65,84.09 v12,84.09 | U15.10 11.95,84.14 v12,84.09 | U15.7 13.45,84.53 13.02,84.09 v12,84.09 | JP11.2 v25.53,114.76
  Top 0.508: U13.5 35.37,117.53 C34.1 C35.1 35.27,114.97 35.05,114.76 v34.8,114.76 | U16.8 26.8,122.67 R48.2 26.8,122.59 26.8,121.11 C36.1 26.76,117.39 v26.67,117.3
  Top 0.61: R43.2 20.1,75.84 v23.2,78.95 C30.1 C31.1 | R42.2 43.27,78.86 v43.31,78.82 | J11.1 33.91,98 34.29,97.61 34.29,96.51 34.67,96.13 C29.1
  Bottom 0.61: v12,84.09 13.72,84.09 15.55,85.93 v21.59,85.93 v23.11,85.93 | v23.11,85.93 23.2,85.93 v23.2,78.95 | v43.31,78.82 41.66,78.82 39.24,81.23 39.24,89.61 | 39.24,89.61 39.24,94.44 38.1,95.58 36.2,95.58 34.8,96.98 34.8,98 | J11.1 34.8,98 | 34.8,98 v34.8,114.76 34.8,116.67 34.16,117.3 v26.67,117.3 25.53,116.16 v25.53,114.76 | 39.24,89.61 37.21,89.61 36.58,90.25 36.58,92.28 36.07,92.79 25.91,92.79 25.02,91.9 25.02,86.44 24.51,85.93 v23.11,85.93
3.3V4  (via drill 0.3)
  Top 0.203: R52.2 v60.1,85.93 | R53.2 v61.62,85.93 | C40.1 63.02,81.61 63.12,81.51 U18.34 | C39.1 62.76,80.09 63.18,80.51 U18.35 | C38.1 73.94,95.27 74.26,94.95 U18.15 | C42.1 49.15,84.09 v50.5,84.09 | U19.10 50.46,84.14 v50.5,84.09 | U19.7 51.96,84.53 51.53,84.09 v50.5,84.09 | JP14.2 v64.03,114.76
  Top 0.508: U17.5 73.87,117.53 C43.1 C44.1 73.77,114.97 73.56,114.76 v73.3,114.76 | U20.8 65.3,122.67 R60.2 65.3,122.59 65.3,121.11 C45.1 65.26,117.39 v65.18,117.3
  Top 0.61: R55.2 58.61,75.84 v61.71,78.95 C39.1 C40.1 | R54.2 81.77,78.86 v81.81,78.82 | J14.1 72.42,98 72.8,97.61 72.8,96.51 73.18,96.13 C38.1
  Bottom 0.61: v50.5,84.09 52.22,84.09 54.06,85.93 v60.1,85.93 v61.62,85.93 | v61.62,85.93 61.71,85.93 v61.71,78.95 | v81.81,78.82 80.16,78.82 77.75,81.23 77.75,89.61 | 77.75,89.61 77.75,94.44 76.61,95.58 74.7,95.58 73.3,96.98 73.3,98 | J14.1 73.3,98 | 73.3,98 v73.3,114.76 73.3,116.67 72.67,117.3 v65.18,117.3 64.03,116.16 v64.03,114.76 | 77.75,89.61 75.72,89.61 75.08,90.25 75.08,92.28 74.57,92.79 64.41,92.79 63.52,91.9 63.52,86.44 63.02,85.93 v61.62,85.93
3.3V5  (via drill 0.3)
  Top 0.203: R64.2 v98.61,85.93 | R65.2 v100.13,85.93 | C49.1 101.53,81.61 101.63,81.51 U22.34 | C48.1 101.27,80.09 101.69,80.51 U22.35 | C47.1 112.45,95.27 112.77,94.95 U22.15 | C51.1 87.66,84.09 v89.01,84.09 | U23.10 88.97,84.14 v89.01,84.09 | U23.7 90.47,84.53 90.04,84.09 v89.01,84.09 | JP17.2 v102.54,114.76
  Top 0.508: U21.5 112.38,117.53 C52.1 C53.1 112.28,114.97 112.07,114.76 v111.81,114.76 | U24.8 103.81,122.67 R72.2 103.81,122.59 103.81,121.11 C54.1 103.77,117.39 v103.69,117.3
  Top 0.61: R67.2 97.12,75.84 v100.22,78.95 C48.1 C49.1 | R66.2 120.28,78.86 v120.32,78.82 | J17.1 110.92,98 111.31,97.61 111.31,96.51 111.69,96.13 C47.1
  Bottom 0.61: v89.01,84.09 90.73,84.09 92.57,85.93 v98.61,85.93 v100.13,85.93 | v100.13,85.93 100.22,85.93 v100.22,78.95 | v120.32,78.82 118.67,78.82 116.26,81.23 116.26,89.61 | 116.26,89.61 116.26,94.44 115.12,95.58 113.21,95.58 111.81,96.98 111.81,98 | J17.1 111.81,98 | 111.81,98 v111.81,114.76 111.81,116.67 111.18,117.3 v103.69,117.3 102.54,116.16 v102.54,114.76 | 116.26,89.61 114.23,89.61 113.59,90.25 113.59,92.28 113.08,92.79 102.92,92.79 102.03,91.9 102.03,86.44 101.53,85.93 v100.13,85.93
!CS!  (via drill 0.3)
  Top 0.203: U1.31 30.86,51.84 31.65,51.05 v31.65,36.32 | v25.43,36.32 25.43,26.16 23.11,23.84 J1.49
  Bottom 0.203: v25.43,36.32 v31.65,36.32
!CS!1  (via drill 0.3)
  Top 0.203: U6.31 69.37,51.84 70.16,51.05 v70.16,36.32 | v63.94,36.32 63.94,26.16 61.62,23.84 J4.49
  Bottom 0.203: v63.94,36.32 v70.16,36.32
!CS!2  (via drill 0.3)
  Top 0.203: U10.31 107.88,51.84 108.67,51.05 v108.67,36.32 | v102.44,36.32 102.44,26.16 100.12,23.84 J7.49
  Bottom 0.203: v102.44,36.32 v108.67,36.32
!CS!3  (via drill 0.3)
  Top 0.203: U14.31 20.86,84.51 20.07,85.3 v20.07,100.03 | v26.29,100.03 26.29,110.19 28.61,112.51 J10.49
  Bottom 0.203: v26.29,100.03 v20.07,100.03
!CS!4  (via drill 0.3)
  Top 0.203: U18.31 59.36,84.51 58.57,85.3 v58.57,100.03 | v64.8,100.03 64.8,110.19 67.11,112.51 J13.49
  Bottom 0.203: v64.8,100.03 v58.57,100.03
!CS!5  (via drill 0.3)
  Top 0.203: U22.31 97.87,84.51 97.08,85.3 v97.08,100.03 | v103.3,100.03 103.3,110.19 105.62,112.51 J16.49
  Bottom 0.203: v103.3,100.03 v97.08,100.03
CIPO  (via drill 0.3)
  Top 0.203: U1.33 30.89,53.84 32.67,52.07 v32.67,33.91 | v30,33.91 33.1,30.81 33.1,3.94 33.61,3.43 J1.7
  Bottom 0.203: v30,33.91 v32.67,33.91
CIPO1  (via drill 0.3)
  Top 0.203: U6.33 69.4,53.84 71.18,52.07 v71.18,33.91 | v68.51,33.91 71.61,30.81 71.61,3.94 72.12,3.43 J4.7
  Bottom 0.203: v68.51,33.91 v71.18,33.91
CIPO2  (via drill 0.3)
  Top 0.203: U10.33 107.91,53.84 109.68,52.07 v109.68,33.91 | v107.02,33.91 110.12,30.81 110.12,3.94 110.62,3.43 J7.7
  Bottom 0.203: v107.02,33.91 v109.68,33.91
CIPO3  (via drill 0.3)
  Top 0.203: U14.33 20.82,82.51 19.05,84.28 v19.05,102.44 | v21.72,102.44 18.62,105.54 18.62,132.41 18.11,132.92 J10.7
  Bottom 0.203: v21.72,102.44 v19.05,102.44
CIPO4  (via drill 0.3)
  Top 0.203: U18.33 59.33,82.51 57.56,84.28 v57.56,102.44 | v60.22,102.44 57.12,105.54 57.12,132.41 56.61,132.92 J13.7
  Bottom 0.203: v60.22,102.44 v57.56,102.44
CIPO5  (via drill 0.3)
  Top 0.203: U22.33 97.84,82.51 96.06,84.28 v96.06,102.44 | v98.73,102.44 95.63,105.54 95.63,132.41 95.12,132.92 J16.7
  Bottom 0.203: v98.73,102.44 v96.06,102.44
COPI  (via drill 0.3)
  Top 0.203: U1.32 31,52.84 32.16,51.69 v32.16,35.18 | v30.51,35.18 30.51,34.42 33.6,31.32 33.6,4.2 34.11,3.69 J1.5
  Bottom 0.203: v32.16,35.18 v30.51,35.18
COPI1  (via drill 0.3)
  Top 0.203: U6.32 69.51,52.84 70.67,51.69 v70.67,35.18 | v69.02,35.18 69.02,34.42 72.11,31.32 72.11,4.2 72.62,3.69 J4.5
  Bottom 0.203: v70.67,35.18 v69.02,35.18
COPI2  (via drill 0.3)
  Top 0.203: U10.32 108.02,52.84 109.17,51.69 v109.17,35.18 | v107.52,35.18 107.52,34.42 110.62,31.32 110.62,4.2 111.12,3.69 J7.5
  Bottom 0.203: v109.17,35.18 v107.52,35.18
COPI3  (via drill 0.3)
  Top 0.203: U14.32 20.71,83.51 19.56,84.66 v19.56,101.17 | v21.21,101.17 21.21,101.93 18.12,105.03 18.12,132.15 17.61,132.66 J10.5
  Bottom 0.203: v19.56,101.17 v21.21,101.17
COPI4  (via drill 0.3)
  Top 0.203: U18.32 59.22,83.51 58.06,84.66 v58.06,101.17 | v59.71,101.17 59.71,101.93 56.62,105.03 56.62,132.15 56.11,132.66 J13.5
  Bottom 0.203: v58.06,101.17 v59.71,101.17
COPI5  (via drill 0.3)
  Top 0.203: U22.32 97.73,83.51 96.57,84.66 v96.57,101.17 | v98.22,101.17 98.22,101.93 95.13,105.03 95.13,132.15 94.62,132.66 J16.5
  Bottom 0.203: v96.57,101.17 v98.22,101.17
EN
  Top 0.203: J1.71 17.61,3.48 18.19,4.06 19.08,4.06 19.84,4.83 19.84,12.06 19.33,12.57 R12.2 18.25,12.67 U3.3
EN1
  Top 0.203: J4.71 56.12,3.48 56.7,4.06 57.59,4.06 58.35,4.83 58.35,12.06 57.84,12.57 R13.2 56.76,12.67 U5.3
EN2
  Top 0.203: J7.71 94.62,3.48 95.2,4.06 96.09,4.06 96.86,4.83 96.86,12.06 96.35,12.57 R25.2 95.27,12.67 U9.3
EN3
  Top 0.203: J10.71 34.11,132.87 33.53,132.29 32.64,132.29 31.88,131.52 31.88,124.28 32.38,123.78 R37.2 33.47,123.68 U13.3
EN4
  Top 0.203: J13.71 72.61,132.87 72.03,132.29 71.15,132.29 70.38,131.52 70.38,124.28 70.89,123.78 R49.2 71.97,123.68 U17.3
EN5
  Top 0.203: J16.71 111.12,132.87 110.54,132.29 109.65,132.29 108.89,131.52 108.89,124.28 109.4,123.78 R61.2 110.48,123.68 U21.3
EWP  (via drill 0.3)
  Top 0.203: R11.1 26.66,12.95 26.19,12.48 U4.7 v26.19,9.53
  Bottom 0.203: J1.40 25.36,2.99 24.29,4.06 24.29,5.97 24.79,6.48 25.81,6.48 26.32,6.99 26.32,8.51 | 26.32,8.51 26.32,9.4 v26.19,9.53 | JP3.2 26.32,8.51
EWP1  (via drill 0.3)
  Top 0.203: R24.1 65.17,12.95 64.7,12.48 U8.7 v64.7,9.53
  Bottom 0.203: J4.40 63.87,2.99 62.79,4.06 62.79,5.97 63.3,6.48 64.32,6.48 64.83,6.99 64.83,8.51 | 64.83,8.51 64.83,9.4 v64.7,9.53 | JP6.2 64.83,8.51
EWP2  (via drill 0.3)
  Top 0.203: R36.1 103.67,12.95 103.2,12.48 U12.7 v103.2,9.53
  Bottom 0.203: J7.40 102.37,2.99 101.3,4.06 101.3,5.97 101.81,6.48 102.82,6.48 103.33,6.99 103.33,8.51 | 103.33,8.51 103.33,9.4 v103.2,9.53 | JP9.2 103.33,8.51
EWP3  (via drill 0.3)
  Top 0.203: R48.1 25.06,123.4 25.53,123.86 U16.7 v25.53,126.83
  Bottom 0.203: J10.40 26.36,133.36 27.43,132.29 27.43,130.38 26.92,129.87 25.91,129.87 25.4,129.37 25.4,127.84 | 25.4,127.84 25.4,126.95 v25.53,126.83 | JP12.2 25.4,127.84
EWP4  (via drill 0.3)
  Top 0.203: R60.1 63.56,123.4 64.03,123.86 U20.7 v64.03,126.83
  Bottom 0.203: J13.40 64.86,133.36 65.94,132.29 65.94,130.38 65.43,129.87 64.41,129.87 63.91,129.37 63.91,127.84 | 63.91,127.84 63.91,126.95 v64.03,126.83 | JP15.2 63.91,127.84
EWP5  (via drill 0.3)
  Top 0.203: R72.1 102.07,123.4 102.54,123.86 U24.7 v102.54,126.83
  Bottom 0.203: J16.40 103.37,133.36 104.45,132.29 104.45,130.38 103.94,129.87 102.92,129.87 102.42,129.37 102.42,127.84 | 102.42,127.84 102.42,126.95 v102.54,126.83 | JP18.2 102.42,127.84
FACTORY_RESET  (via drill 0.3)
  Top 0.203: U1.26 27.35,46.84 27.46,46.74 28.09,46.74 | R5.1 30.13,46.99 29.87,46.74 28.09,46.74 | 28.09,46.74 v28.09,33.02 | S2.3 20.37,32.99 v20.35,33.02
  Bottom 0.203: v20.35,33.02 v28.09,33.02
FACTORY_RESET1  (via drill 0.3)
  Top 0.203: U6.26 65.86,46.84 65.97,46.74 66.6,46.74 | R16.1 68.64,46.99 68.38,46.74 66.6,46.74 | 66.6,46.74 v66.6,33.02 | S4.3 58.88,32.99 v58.86,33.02
  Bottom 0.203: v58.86,33.02 v66.6,33.02
FACTORY_RESET2  (via drill 0.3)
  Top 0.203: U10.26 104.37,46.84 104.48,46.74 105.11,46.74 | R28.1 107.14,46.99 106.89,46.74 105.11,46.74 | 105.11,46.74 v105.11,33.02 | S6.3 97.39,32.99 v97.36,33.02
  Bottom 0.203: v97.36,33.02 v105.11,33.02
FACTORY_RESET3  (via drill 0.3)
  Top 0.203: U14.26 24.37,89.51 24.26,89.61 23.62,89.61 | R40.1 21.59,89.36 21.84,89.61 23.62,89.61 | 23.62,89.61 v23.62,103.33 | S8.3 31.34,103.36 v31.37,103.33
  Bottom 0.203: v31.37,103.33 v23.62,103.33
FACTORY_RESET4  (via drill 0.3)
  Top 0.203: U18.26 62.87,89.51 62.76,89.61 62.13,89.61 | R52.1 60.1,89.36 60.35,89.61 62.13,89.61 | 62.13,89.61 v62.13,103.33 | S10.3 69.85,103.36 v69.88,103.33
  Bottom 0.203: v69.88,103.33 v62.13,103.33
FACTORY_RESET5  (via drill 0.3)
  Top 0.203: U22.26 101.38,89.51 101.27,89.61 100.64,89.61 | R64.1 98.61,89.36 98.86,89.61 100.64,89.61 | 100.64,89.61 v100.64,103.33 | S12.3 108.36,103.36 v108.38,103.33
  Bottom 0.203: v108.38,103.33 v100.64,103.33
GND  (via drill 0.3)  (221 unrouted)
  Top 0.203: J1.GND4 43.09,42.67 42.83,42.67 42.56,42.94 J1.GND5 42.56,45.07 43.59,46.1 J1.GND6 | J1.GND1 8.27,41.9 8.54,42.16 8.54,42.67 9.16,43.29 J1.GND2 9.16,44.82 9.17,44.83 9.17,45.21 8.28,46.1 J1.GND3 | J1.33 27.11,2.76 26.95,2.92 25.61,2.92 | J1.45 24.11,2.75 24.29,2.92 25.61,2.92 | J1.39 25.61,2.92
  other vias: 14.25,55.88 14.25,58.42 14.25,53.34 14.25,50.8 14.25,48.26 15.65,57.15 15.65,54.61 15.65,52.07 15.65,49.53 15.65,46.99 16.92,58.42 16.92,55.88 16.92,53.34 16.92,50.8 16.92,48.26 16.92,45.72 16.03,44.58 18.19,46.99 20.73,46.99 23.27,46.99 19.46,48.26 22,48.26 24.54,48.26 24.54,45.72 22,45.72 19.46,45.72 18.19,49.53 20.73,49.53 23.27,49.53 24.54,50.8 24.54,53.34 24.54,55.88 24.54,58.42 24.54,60.96 24.54,63.5 23.27,52.07 23.27,54.61 23.27,57.15 23.27,59.69 23.27,62.23 23.27,64.39 22,63.5 22,60.96 22,58.42 19.46,58.42 11.71,58.42 9.17,58.42 10.57,59.69 10.57,62.23 10.57,64.39 8.03,59.69 8.03,62.23 8.03,64.39 12.85,58.42 8.03,52.07 10.57,49.53 8.03,47.12 10.57,44.45 20.73,57.15 18.19,57.15 19.46,56.01 22,56.01 19.46,50.29 22,50.29 20.47,3.81 29.36,3.81 25.81,64.39 25.81,62.23 25.81,59.69 25.81,56.77 28.35,59.69 27.08,63.5 27.08,60.96 27.33,58.42 27.59,57.15 33.43,57.15 33.43,52.07 32.41,61.09 31.14,57.66 31.4,54.61 35.71,57.15 35.97,62.23 39.78,62.23 42.32,63.5 37.24,63.5 37.24,60.96 42.32,60.96 43.59,54.61 43.59,49.53 40.41,50.8 41.05,44.45 41.05,39.37 41.05,34.29 41.05,29.21 41.05,24.13 41.05,19.05 41.05,13.97 41.05,8.89 43.59,6.35 43.59,11.43 43.59,16.51 43.59,21.59 43.59,26.67 43.59,31.75 43.59,36.83 38.51,41.91 38.51,36.83 38.51,31.75 38.51,26.67 38.51,21.59 38.51,16.51 38.51,11.43 38.51,6.35 38.13,46.99 33.43,46.99 38.76,54.36 40.54,55.88 23.27,44.58 20.73,44.58 18.19,44.58 30.38,43.81 32.41,4.06 13.11,6.35 8.03,6.35 35.97,8.89 25.55,8.89 20.47,8.89 15.39,8.89 10.57,8.89 13.11,11.43 8.03,11.43 35.97,13.97 20.47,13.97 15.39,13.97 10.57,13.97 17.3,15.75 13.11,16.51 8.03,16.51 35.97,19.05 19.33,18.03 15.39,19.05 10.57,19.05 28.35,21.59 18.19,21.59 13.11,21.59 8.03,21.59 35.97,24.13 33.43,41.91 35.97,39.37 25.43,39.37 33.43,36.83 23.27,36.83 18.19,36.83 13.11,36.83 35.97,34.29 20.73,34.29 15.65,34.29 35.97,29.21 20.73,29.21 15.65,29.21 28.35,26.67 23.27,26.67 18.19,26.67 13.11,26.67 18.19,31.75 13.11,31.75 10.57,34.29 10.57,39.37 10.57,24.13 10.57,29.21 8.03,26.67 8.03,31.75 8.03,36.83 28.35,15.24 35.97,44.45 35.97,49.53 35.97,54.61 24.28,3.05 28.48,4.32 32.41,9.14 32.41,11.68 32.41,16.76 32.41,21.84 32.41,26.92 26.44,41.78
  pour Top (isolate 0.203): 44.86,0 6.86,0 6.86,65 44.86,65
  pour Bottom (isolate 0.203): 6.86,0 44.86,0 44.86,65 6.86,65
  pour Bottom (isolate 0.305, no thermals): 20.86,60.75 20.86,64.51 22.86,64.51 22.86,60.75
GND1  (via drill 0.3)  (221 unrouted)
  Top 0.203: J4.GND4 81.6,42.67 81.34,42.67 81.07,42.94 J4.GND5 81.07,45.07 82.1,46.1 J4.GND6 | J4.GND1 46.78,41.9 47.05,42.16 47.05,42.67 47.67,43.29 J4.GND2 47.67,44.82 47.68,44.83 47.68,45.21 46.79,46.1 J4.GND3 | J4.33 65.62,2.76 65.46,2.92 64.12,2.92 | J4.45 62.62,2.75 62.79,2.92 64.12,2.92 | J4.39 64.12,2.92
  other vias: 52.76,55.88 52.76,58.42 52.76,53.34 52.76,50.8 52.76,48.26 54.16,57.15 54.16,54.61 54.16,52.07 54.16,49.53 54.16,46.99 55.43,58.42 55.43,55.88 55.43,53.34 55.43,50.8 55.43,48.26 55.43,45.72 54.54,44.58 56.7,46.99 59.24,46.99 61.78,46.99 57.97,48.26 60.51,48.26 63.05,48.26 63.05,45.72 60.51,45.72 57.97,45.72 56.7,49.53 59.24,49.53 61.78,49.53 63.05,50.8 63.05,53.34 63.05,55.88 63.05,58.42 63.05,60.96 63.05,63.5 61.78,52.07 61.78,54.61 61.78,57.15 61.78,59.69 61.78,62.23 61.78,64.39 60.51,63.5 60.51,60.96 60.51,58.42 57.97,58.42 50.22,58.42 47.68,58.42 49.08,59.69 49.08,62.23 49.08,64.39 46.54,59.69 46.54,62.23 46.54,64.39 51.36,58.42 46.54,52.07 49.08,49.53 46.54,47.12 49.08,44.45 59.24,57.15 56.7,57.15 57.97,56.01 60.51,56.01 57.97,50.29 60.51,50.29 58.98,3.81 67.87,3.81 64.32,64.39 64.32,62.23 64.32,59.69 64.32,56.77 66.86,59.69 65.59,63.5 65.59,60.96 65.84,58.42 66.1,57.15 71.94,57.15 71.94,52.07 70.92,61.09 69.65,57.66 69.91,54.61 74.22,57.15 74.48,62.23 78.29,62.23 80.83,63.5 75.75,63.5 75.75,60.96 80.83,60.96 82.1,54.61 82.1,49.53 78.92,50.8 79.56,44.45 79.56,39.37 79.56,34.29 79.56,29.21 79.56,24.13 79.56,19.05 79.56,13.97 79.56,8.89 82.1,6.35 82.1,11.43 82.1,16.51 82.1,21.59 82.1,26.67 82.1,31.75 82.1,36.83 77.02,41.91 77.02,36.83 77.02,31.75 77.02,26.67 77.02,21.59 77.02,16.51 77.02,11.43 77.02,6.35 76.64,46.99 71.94,46.99 77.27,54.36 79.05,55.88 61.78,44.58 59.24,44.58 56.7,44.58 68.89,43.81 70.92,4.06 51.62,6.35 46.54,6.35 74.48,8.89 64.06,8.89 58.98,8.89 53.9,8.89 49.08,8.89 51.62,11.43 46.54,11.43 74.48,13.97 58.98,13.97 53.9,13.97 49.08,13.97 55.81,15.75 51.62,16.51 46.54,16.51 74.48,19.05 57.84,18.03 53.9,19.05 49.08,19.05 66.86,21.59 56.7,21.59 51.62,21.59 46.54,21.59 74.48,24.13 71.94,41.91 74.48,39.37 63.94,39.37 71.94,36.83 61.78,36.83 56.7,36.83 51.62,36.83 74.48,34.29 59.24,34.29 54.16,34.29 74.48,29.21 59.24,29.21 54.16,29.21 66.86,26.67 61.78,26.67 56.7,26.67 51.62,26.67 56.7,31.75 51.62,31.75 49.08,34.29 49.08,39.37 49.08,24.13 49.08,29.21 46.54,26.67 46.54,31.75 46.54,36.83 66.86,15.24 74.48,44.45 74.48,49.53 74.48,54.61 62.79,3.05 66.98,4.32 70.92,9.14 70.92,11.68 70.92,16.76 70.92,21.84 70.92,26.92 64.95,41.78
  pour Top (isolate 0.203): 83.37,0 45.37,0 45.37,65 83.37,65
  pour Bottom (isolate 0.203): 45.37,0 83.37,0 83.37,65 45.37,65
  pour Bottom (isolate 0.305, no thermals): 59.37,60.75 59.37,64.51 61.37,64.51 61.37,60.75
GND2  (via drill 0.3)  (221 unrouted)
  Top 0.203: J7.GND4 120.1,42.67 119.84,42.67 119.57,42.94 J7.GND5 119.57,45.07 120.6,46.1 J7.GND6 | J7.GND1 85.29,41.9 85.55,42.16 85.55,42.67 86.17,43.29 J7.GND2 86.17,44.82 86.19,44.83 86.19,45.21 85.3,46.1 J7.GND3 | J7.33 104.12,2.76 103.97,2.92 102.62,2.92 | J7.45 101.12,2.75 101.3,2.92 102.62,2.92 | J7.39 102.62,2.92